# Altium PCB BMS_2S.PcbDoc
Units mm, origin at the board's own origin, x right, y up, seen from the top; angles counter-clockwise.
Board outline 152.4 x 101.6 mm, 2 copper layers (Top Layer, Bottom Layer); 20 components, 17 nets, 56 pads, 0 vias.
Unrouted connection lines stored in the file: 39.
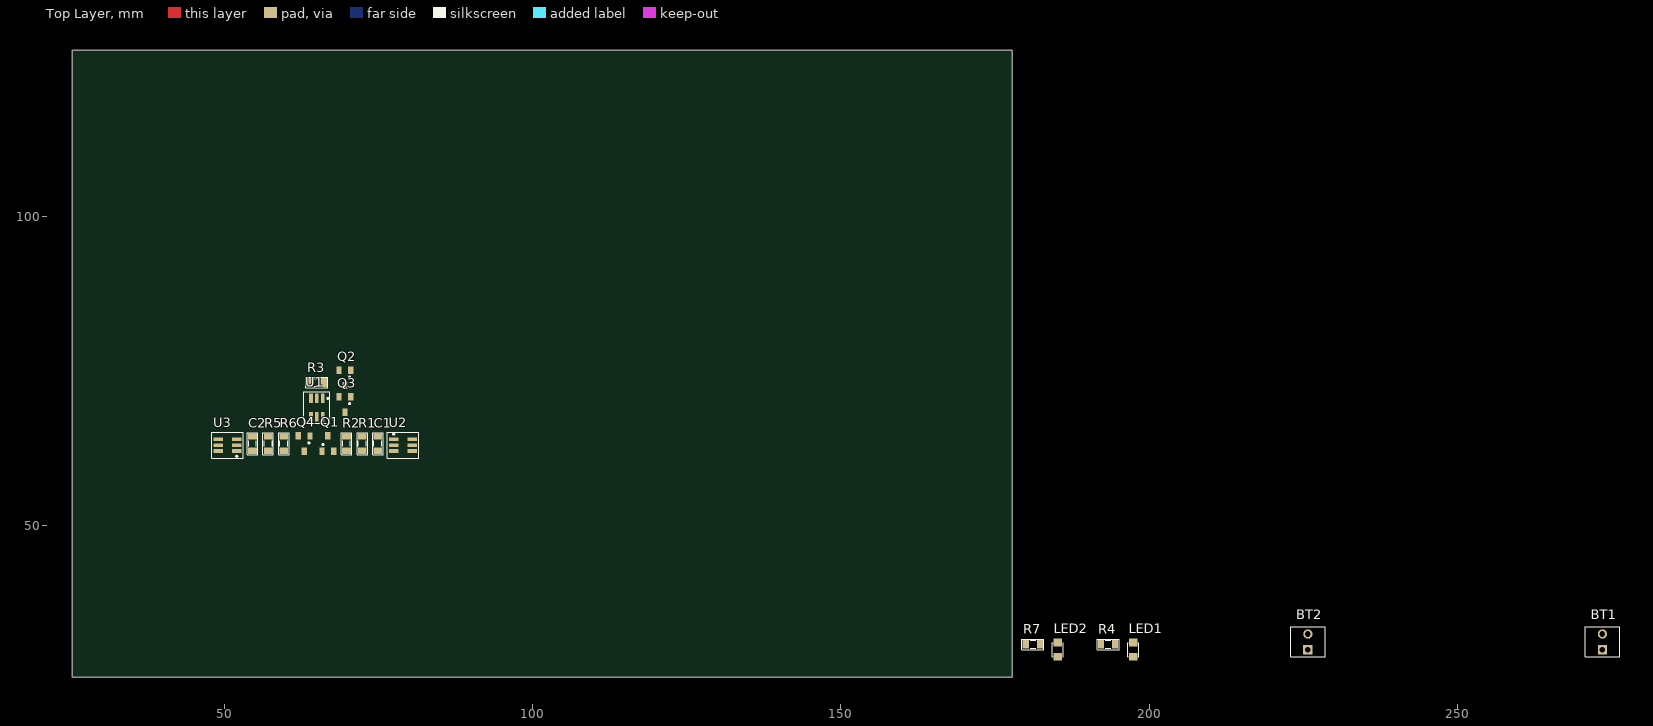
[diagram p0: Top Layer view]
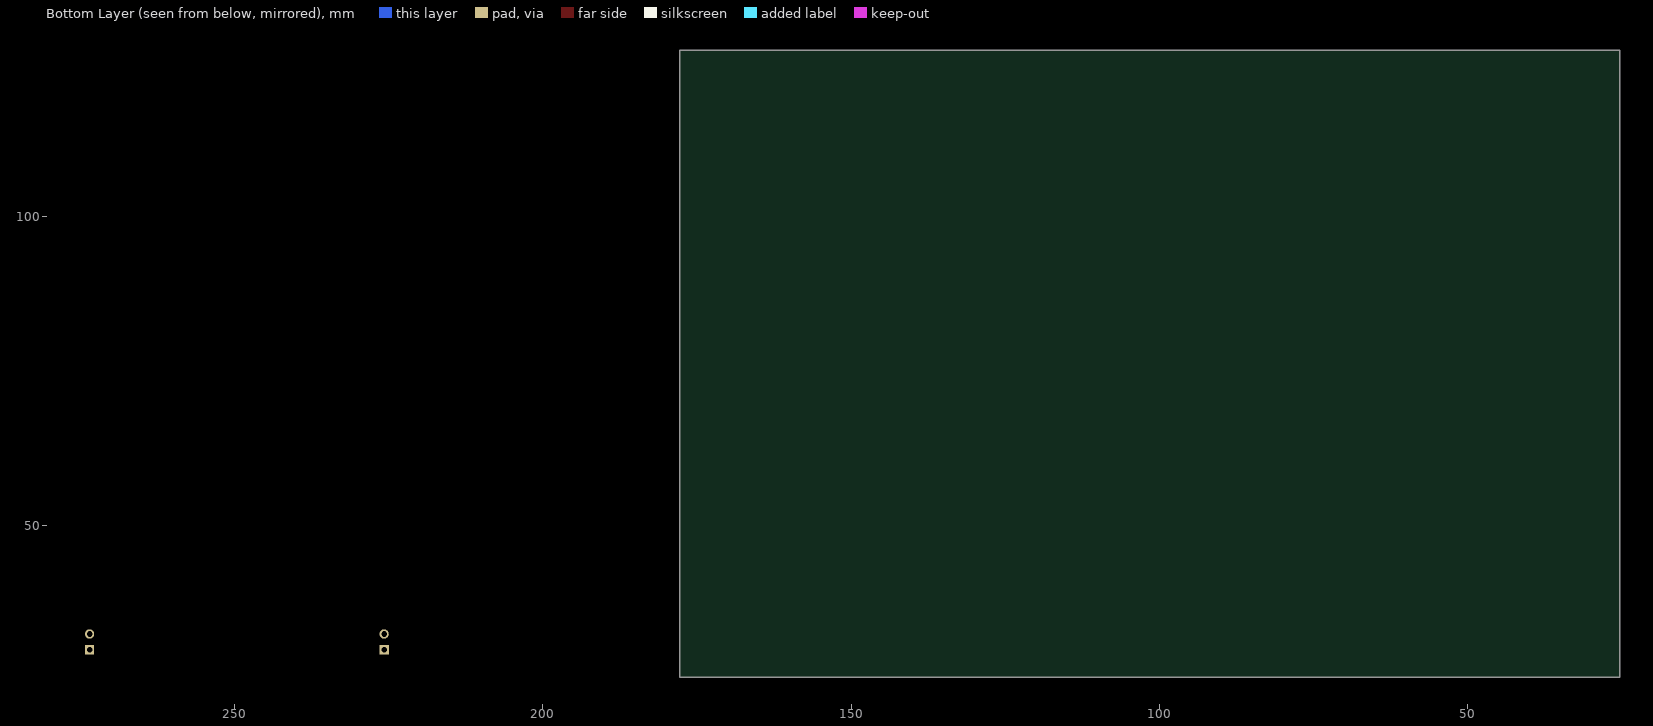
[diagram p1: Bottom Layer view, seen from below]

## Layer stack, top to bottom
Top Solder: solder mask 0.0102, Solder Resist, Dk 3.5
Top Layer: signal copper 0.0356
Dielectric 1: dielectric 0.32, FR-4, Dk 4.8
Bottom Layer: signal copper 0.0356
Bottom Solder: solder mask 0.0102, Solder Resist, Dk 3.5

## Board outline
25.4,25.4 177.8,25.4 177.8,127 25.4,127

## Design rules (kind name [scope] priority, off if disabled: settings)
Clearance [All] p1: gap=0.254 ignorepadtopadclearanceinfootprint=FALSE
PolygonConnect [All] p1: connectstyle=Relief reliefconductorwidth=0.254 reliefentries=4 polygonreliefangle="90 Angle" airgapwidth=0.254
RoutingVias [All] p1: holewidth=0.711 width=1.27 viastyle="Through Hole" minholewidth=0.711 minwidth=1.27 maxholewidth=0.711 maxwidth=1.27
SolderMaskExpansion [All] p1: expansion=0.102 istentingtop=FALSE
SupplyNets "Schematic Supply Nets_1" [InNet('VCC')] p1: voltage=0.000
SupplyNets "Schematic Supply Nets" [InNet('GND')] p2: voltage=0.000
Width [All] p1: maxlimit=0.254 minlimit=0.254 preferedwidth=0.254
30 further rules are at their usual default settings.

## Components (designator, comment, footprint, x,y, rotation, side; value= is the part's Value field where it differs from the comment)
BT1 "4.2V" HDR2 273.431,29.845 r90 top
BT2 "4.2V" HDR2 225.679,29.845 r90 top
C1 "104" CAP_0805 74.93,63.246 r90 top value=33p
C2 "104" CAP_0805 54.61,63.246 r270 top value=33p
LED1 "LED" LED-0805-Blue 197.358,28.702 r90 top value="LED 3 ly Single Colour"
LED2 "LED" LED-0805-Blue 185.166,28.702 r90 top value="LED 3 ly Single Colour"
Q1 "SI2302" SOT23 66.802,63.246 r0 top
Q2 "IRLML2502" SOT23 69.596,73.914 r180 top
Q3 "IRLML2502" SOT23 69.596,69.596 r180 top
Q4 "SI2302" SOT23 62.992,63.246 r180 top
R1 "Resistor - SMD" RES-SMD-0805 72.39,63.246 r90 top
R2 "Resistor - SMD" RES-SMD-0805 69.85,63.246 r270 top
R3 "Resistor - SMD" RES-SMD-0805 65.024,73.152 r0 top
R4 "220R" RES-SMD-0805 193.294,30.734 r0 top
R5 "Resistor - SMD" RES-SMD-0805 57.15,63.246 r270 top
R6 "Resistor - SMD" RES-SMD-0805 59.69,63.246 r90 top
R7 "220R" RES-SMD-0805 181.102,30.734 r0 top
U1 "HY2120" sot23-6 65.024,69.088 r270 top
U2 "HY2213" SOT23-6 78.994,62.992 r0 top
U3 "HY2213" SOT23-6 50.546,62.992 r180 top

## Footprints (in the part's own frame and the unit in brackets; to place one, negate y for a bottom-side part, rotate by r counter-clockwise, add the part's x,y. Pads: shape width x height; smd on the part's side, far side on the other; paste and mask are expansions set on the pad)
CAP_0805 [mil]
  rect 39.37x55 smd: 1(-45,0) 2(45,0)
  silkscreen extent -70,-34 70,33, body extent -40,-25 40,25, height 24
HDR2 [mm] "Connector; Header; 2 Position"
  rect 1.5x1.5 hole 0.9: 1(0,0)
  round 1.5 hole 0.9: 2(2.54,0)
  silkscreen extent -1.14,-2.79 3.68,2.77, body extent -1.27,-2.92 3.81,2.88, height 11.72
LED-0805-Blue [mil]
  rect 50x55 smd: 1(0,0) 2(90,0)
  silkscreen extent 0,-35 90,35, body extent 5,-25 85,25, height 43
RES-SMD-0805 [mil]
  rect 39.37x55 smd: 1(-45,0) 2(45,0)
  silkscreen extent -70,-34 70,33, body extent -39,-25 39,25, height 31
SOT23 [mm] "SOT 23 _ 1-3-2"
  rect 0.85x1.2 smd: 1(-0.94,-1.245) 2(0.985,-1.25) 3(0.005,1.25)
  silkscreen extent -0.88,-0.25 -0.64,0, body extent -1.47,-1.33 1.53,1.17, height 1.06
sot23-6 [mm] "SOT23, 5-Leads, Body 3.0x3.0mm (max), Pitch 0.95mm, IPC Medium Density"
  rect 1.5x0.6 smd: 1(-1.5,0.95) 2(-1.5,0) 3(-1.5,-0.95) 4(1.5,-0.95) 5(1.5,0) 6(1.5,0.95)
  silkscreen extent -2.54,-2.11 2.54,2.11, body extent -1.75,-1.52 1.75,1.53, height 1.45
SOT23-6 [mm] "SOT23, 5-Leads, Body 3.0x3.0mm (max), Pitch 0.95mm, IPC Medium Density"
  rect 1.5x0.6 smd: 1(-1.5,0.95) 2(-1.5,0) 3(-1.5,-0.95) 4(1.5,-0.95) 5(1.5,0) 6(1.5,0.95)
  silkscreen extent -2.54,-2.11 2.54,2.11, body extent -1.75,-1.52 1.75,1.53, height 1.45

## Part data
BT1 BT2: library part Battery3.3V, "Multicell Battery", LatestRevisionDate=17-Jul-2002, LatestRevisionNote="Re-released for DXP Platform.", PackageReference=BAT-2, Published=24-Mar-1999, Publisher="Altium Limited"
C1 C2: library part CapSMD, "Capacitor", LatestRevisionDate=17-Jul-2002, LatestRevisionNote="Re-released for DXP Platform.", PackageReference=RAD-0.3, Published=8-Jun-2000, Publisher="Altium Limited"
LED1 LED2: "LED Single colour Green and Red"
Q1 Q2 Q3 Q4: library part MOSFET-N
R1 R2 R3 R5 R6: "Resistor SMD", Manufacturer="Generic Components", Class=Passive, Published=08/06/2000, Publisher="Altium Hobart Technology Centre"
R4 R7: library part "Resistor - SMD", "Resistor SMD", Manufacturer="Generic Components", Class=Passive, Published=08/06/2000, Publisher="Altium Hobart Technology Centre"
U1: "2-Cell Lithium-ion/Lithium Polymer Battery Packs Protection ICs"
U2 U3: library part "Battery Charge Balance IC", "1 Cell Li-ion/Polymer Battery Charge Balance IC  / Multi-cell Li-ion rechargeable battery packs"

## Nets (pads, with @x,y where several pads share a name; then routed paths per layer and width w, separated by ;. In a path a pad name is that pad's centre, name@x,y a point inside that pad or via, vN(x,y) a via of type N, cw(c..) or ccw(c..) an arc to the next point about the centre after c; other vN are vias at no path point)
GND: BT2.2 C2.1 Q2.3 Q3.3 Q4.2 R3.2 R7.2 U1.6 U3.3
NetC1_2: C1.2 R1.2 U2.2
NetC2_2: C2.2 R5.2 U3.2
NetLED1_2: LED1.2 R4.1
NetLED2_2: LED2.2 R7.1
NetQ1_1: Q1.1 U2.6
NetQ1_3: Q1.3 R2.2
NetQ2_1: Q2.1 U1.2
NetQ2_2: Q2.2 Q3.2
NetQ3_1: Q3.1 U1.1
NetQ4_1: Q4.1 U3.6
NetQ4_3: Q4.3 R6.2
NetR3_1: R3.1 U1.3
"NetU2_1, 4, 5": U2.1 U2.4 U2.5
"NetU3_1, 4, 5": U3.1 U3.4 U3.5
VC: BT1.2 BT2.1 C1.1 LED2.1 Q1.2 R4.2 R5.1 R6.1 U1.4 U2.3
VCC: BT1.1 LED1.1 R1.1 R2.1 U1.5